# Altium PCB PCB1.PcbDoc
Units mil, origin at the board's own origin, x right, y up, seen from the top; angles counter-clockwise.
Board outline 2125 x 1205 mil, 2 copper layers (Top Layer, Bottom Layer); 7 components, 10 nets, 28 pads, 0 vias.
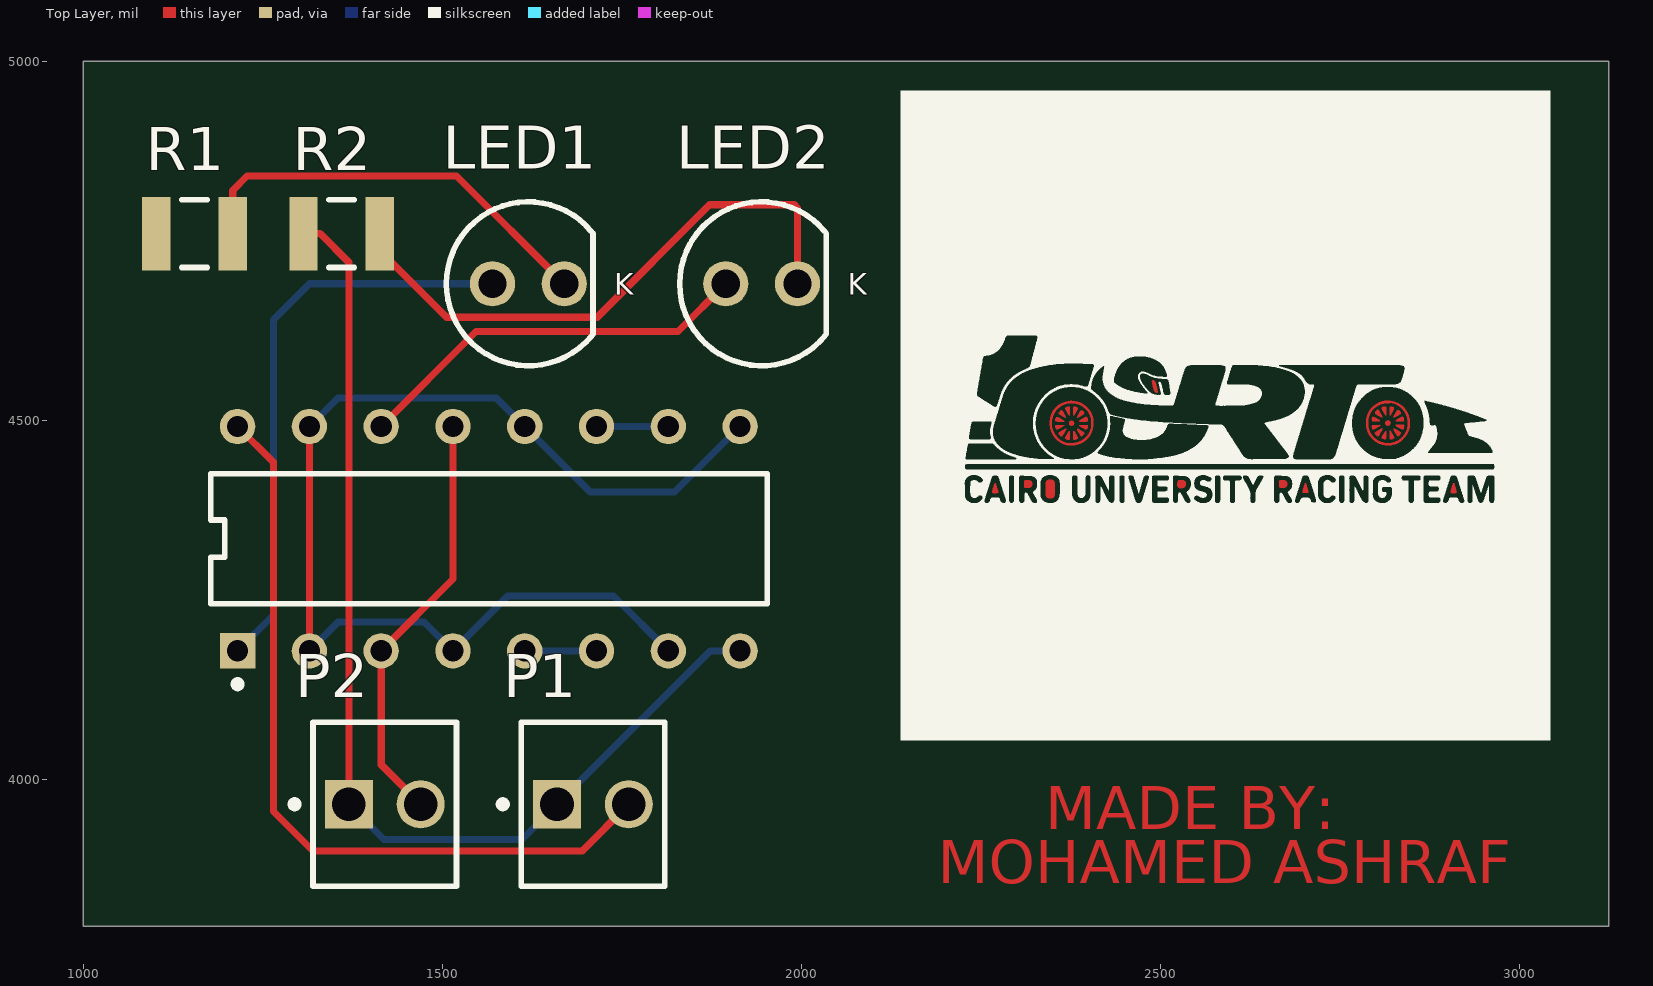
[diagram p0: Top Layer view]
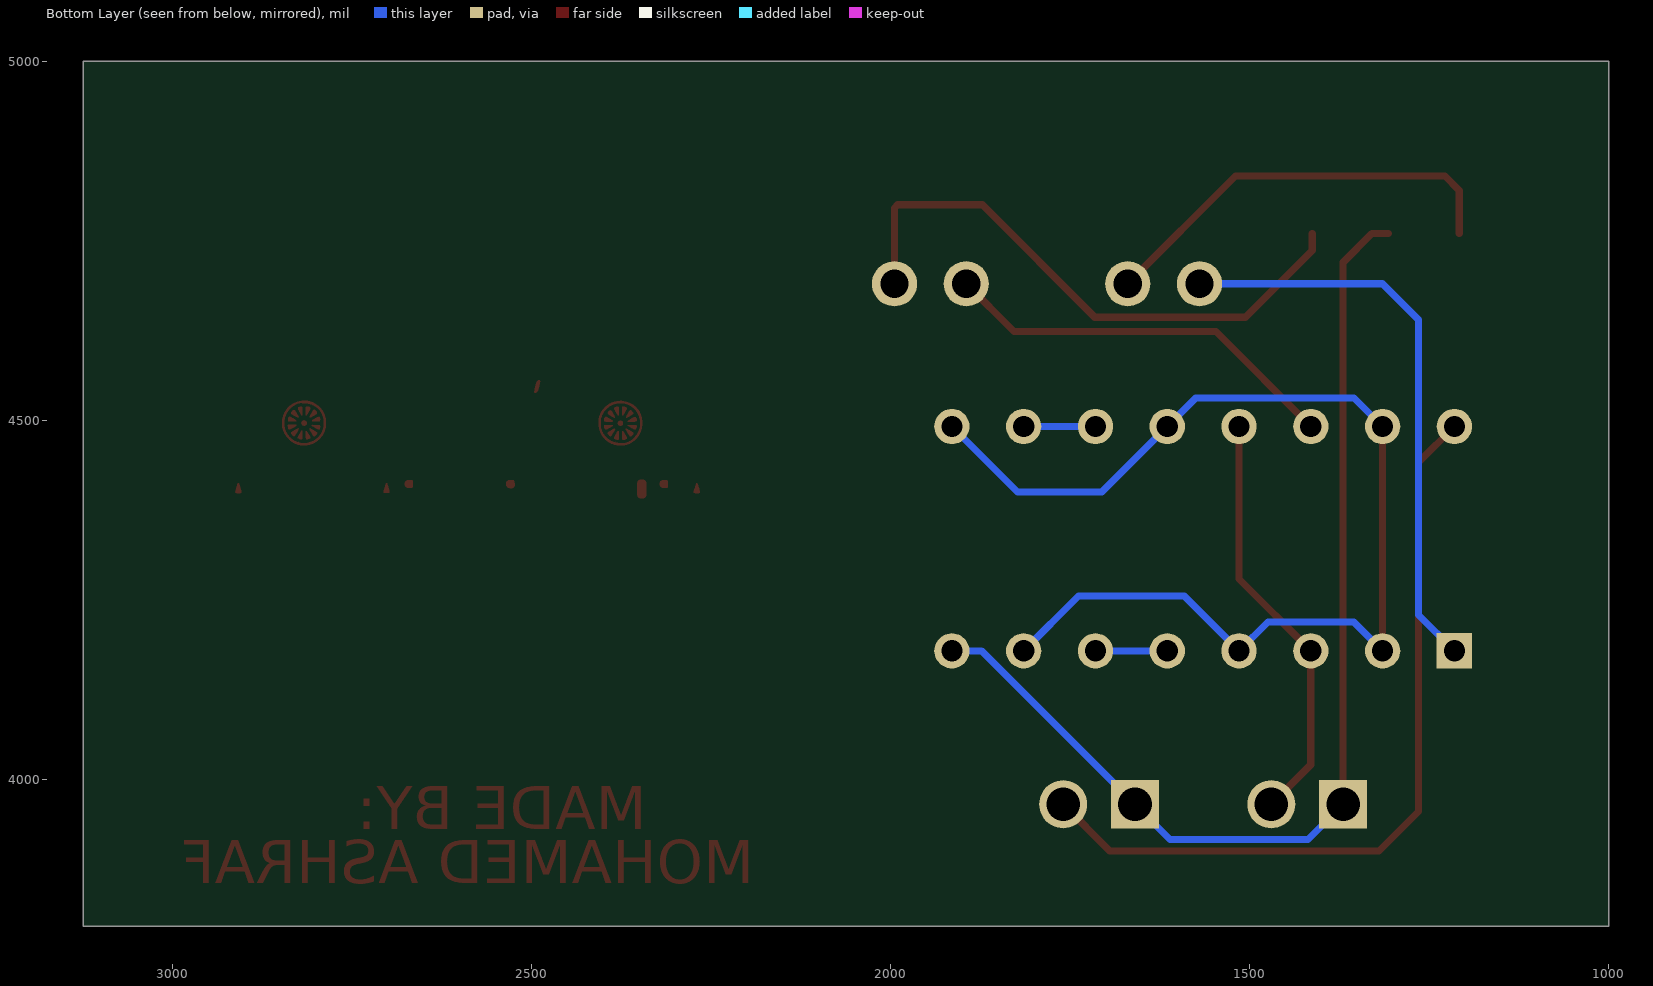
[diagram p1: Bottom Layer view, seen from below]
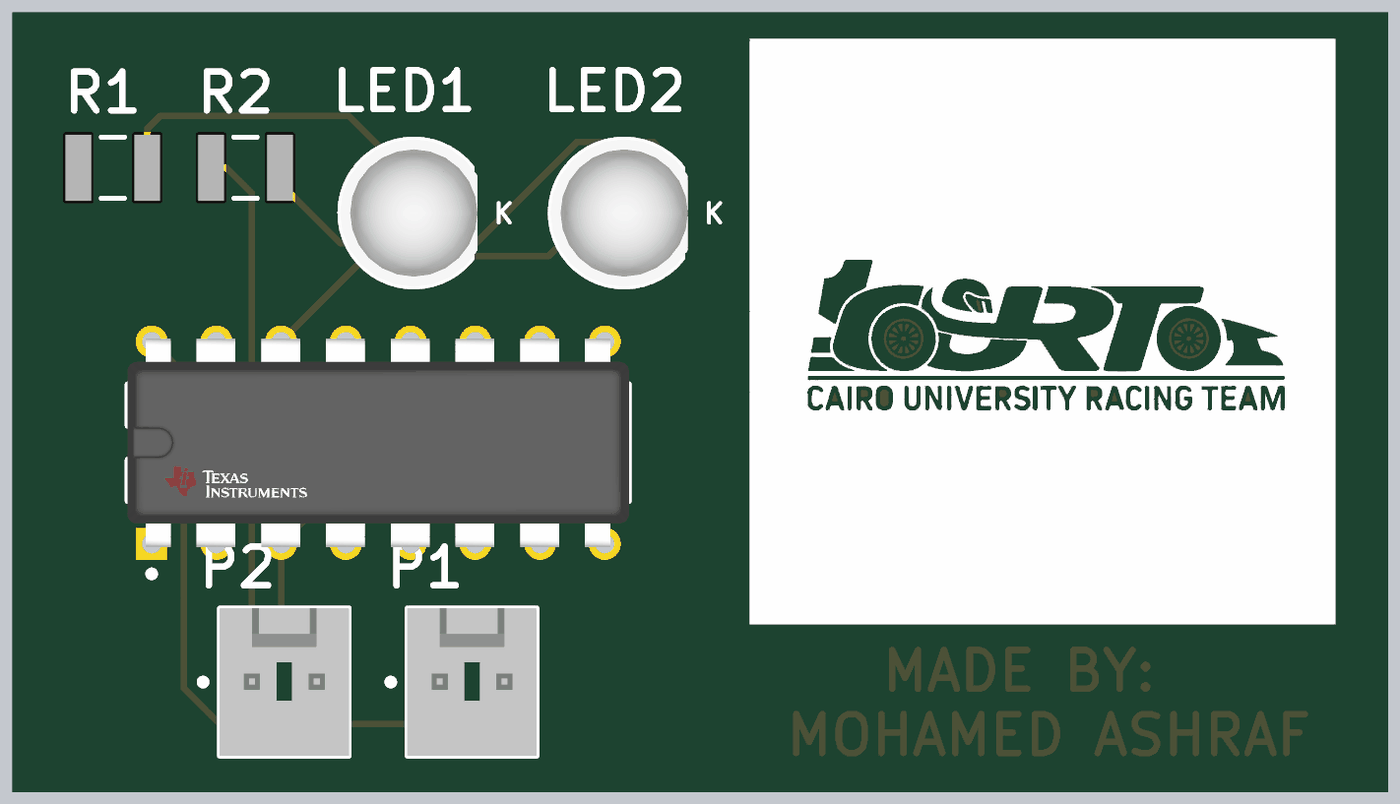
[diagram p2: 3D render of the assembled board from above, using the file's embedded part models]

## Layer stack, top to bottom
Top Solder: solder mask 0.4, Solder Resist, Dk 3.5
Top Layer: signal copper 1.4
Dielectric 1: dielectric 12.6, FR-4, Dk 4.8
Bottom Layer: signal copper 1.4
Bottom Solder: solder mask 0.4, Solder Resist, Dk 3.5

## Board outline
1000,3795 3125,3795 3125,5000 1000,5000

## Design rules (kind name [scope] priority, off if disabled: settings)
Clearance [All] p1: gap=10 ignorepadtopadclearanceinfootprint=FALSE except(0: Arc-Hole Track-Hole SMDPad-Hole THPad-Hole Via-Hole Fill-Hole Poly-Hole Region-Hole Text-Hole)
PolygonConnect [All] p1: connectstyle=Relief reliefconductorwidth=10 reliefentries=4 polygonreliefangle="90 Angle" airgapwidth=10
RoutingVias [All] p1: holewidth=28 width=50 viastyle="Through Hole" minholewidth=28 minwidth=50 maxholewidth=28 maxwidth=50
SolderMaskExpansion [All] p1: expansion=4 istentingtop=FALSE
Width [All] p1: maxlimit=10 minlimit=10 preferedwidth=10
30 further rules are at their usual default settings.

## Components (designator, comment, footprint, x,y, rotation, side; value= is the part's Value field where it differs from the comment)
LED1 "151051BS04000" "BLUE LED" 1620,4690 r0 top
LED2 "151051BS04000" "BLUE LED" 1945,4690 r0 top
P1 "22-27-2021" PIN 1710,3965 r0 top
P2 "22-27-2021" PIN 1420,3965 r0 top
R1 "CRCW1210330RJNEA" "330OHM RES" 1155,4760 r0 top
R2 "CRCW1210330RJNEA" "330OHM RES" 1360,4760 r0 top
? "CD4027BE" "JK FLIP FLOP" 1565,4335 r90 top

## Footprints (in the part's own frame and the unit in brackets; to place one, negate y for a bottom-side part, rotate by r counter-clockwise, add the part's x,y. Pads: shape width x height; smd on the part's side, far side on the other; paste and mask are expansions set on the pad)
"330OHM RES" [mm] "Chip Resistor, 2-Leads, Body 3.20x2.50mm, IPC High Density"
  rect 1x2.6 smd: 1(-1.35,0) 2(1.35,0)
  silkscreen extent -0.45,-1.2 0.45,1.2, body extent -1.7,-1.35 1.7,1.35, height 0.6
"BLUE LED" [mm] "THT, LED-5mm, 2pin- Body 5.8mm"
  round 1.6 hole 1: 1(1.27,0) 2(-1.27,0)
  silkscreen extent -2.9,-2.9 2.29,2.9, body extent -2.9,-2.9 2.5,2.9, height 11.7
"JK FLIP FLOP" [mm]
  rect 1.25x1.25 hole 0.75 paste-1000 mask+0: 1(-3.97,8.89)
  round 1.25 hole 0.75 paste-1000 mask+0: 2(-3.97,6.35) 3(-3.97,3.81) 4(-3.97,1.27) 5(-3.97,-1.27) 6(-3.97,-3.81) 7(-3.97,-6.35) 8(-3.97,-8.89) 9(3.97,-8.89) 10(3.97,-6.35) 11(3.97,-3.81) 12(3.97,-1.27) 13(3.97,1.27) 14(3.97,3.81) 15(3.97,6.35) 16(3.97,8.89)
  silkscreen extent -5.27,-9.84 2.3,9.84, body extent -4.69,-9.94 4.69,9.94, height 0.25
PIN [mm] "Header, 2-Leads, Body 5.8x5.08mm"
  rect 1.7x1.7 hole 1.19: 1(-1.27,0)
  round 1.7 hole 1.19: 2(1.27,0)
  silkscreen extent -3.31,-2.9 2.54,2.9, body extent -2.54,-2.9 2.54,2.9, height 11.72

## Part data
LED1 LED2: library part "BLUE LED", "THT LED round mono-color color lens, WL-TMRW, Blue", Emitting color=Blue, Manufacturer="Wuerth Elektronik", ComponentLink1Description="Manufacturer URL", ComponentLink1URL=http://www.we-online.com, ComponentLink2Description=Datasheet, ComponentLink2URL=http://katalog.we-online.de/pbs/datasheet/7448042001.pdfhttp://katalog.we-online.de/pbs/datasheet/7448042001.pdfhttp://katalog.we-online.de/pbs/datasheet/7448042001.pdfhttp://katalog.we-online.de/pbs/datasheet/151051BS04000.pdf, PackageReference="Type 5mm", PartNumber=151051BS04000
P1 P2: library part PIN, "Male Header, Pitch 2.54 mm, 1 x 2 Position, Height 11.7 mm, Tail Length 3.56 mm, 0 to 75 degC, RoHS, Bulk", Current - Max=4A, Manufacturer=Molex, Operating temperature=0°Cto+75°C, Package Description="2-Leads Header, Body 5.08 x 5.8 mm, Pitch 2.54 mm", Package Version="Rev. BC, 02/2012", PartNumber=0022272021, Voltage - Max=250V, Contact material=Tinplatedbrass, Current rating=4A, Datasheet URL=http://www.molex.com/pdm_docs/sd/022272021_sd.pdf, Datasheet Version="Rev. F, 06/2009", Housing material=Nylon(UL94V-0), Manufacturer URL=http://www.molex.com/, Mounting Technology=ThroughHole, No. of Positions=2, No. of Rows=1, Orientation=Vertical, Package Reference=22-27-2021, Pitch=2.54mm, Voltage rating=250V
R1 R2: library part "330OHM RES", Manufacturer="Vishay Dale", Part Number=CRCW1210330RJNEA
?: library part "JK FLIP FLOP", "IC FF JK TYPE DUAL 1BIT 16DIP", Case/Package=PDIP, Frequency=24MHz, High Level Output Current=-4.2mA, Input Capacitance=5pF, Low Level Output Current=4.2mA, Max Operating Temperature=125°C, Max Supply Voltage=18V, Min Operating Temperature=-55°C, Min Supply Voltage=3V, Operating Supply Voltage=3.3V, Output Current=6.8mA, Package Quantity=25, Power Dissipation=500mW, Quiescent Current=20uA, Clock Edge Trigger Type="Positive Edge", Contact Plating=Gold, Height=4.57mm, Input Type=SINGLE-ENDED, Lead Free="Lead Free", Length=19.3mm, Logic Function=Flip-Flop, Max Frequency=24MHz, Mount="Through Hole", Number of Bits=2, Number of Bits per Element=1, Number of Circuits=2, Number of Elements=2, Number of Input Lines=2, Number of Output Lines=1, Number of Pins=16, Packaging=Rail/Tube, Polarity=Non-Inverting, Propagation Delay=300ns, Radiation Hardening=No, REACH SVHC="No SVHC", RoHS Compliant=Yes, Series=4000B, Technology=CMOS, Turn-On Delay Time=45ns, Weight=0.03357oz, Width=6.35mm

## Nets (pads, with @x,y where several pads share a name; then routed paths per layer and width w, separated by ;. In a path a pad name is that pad's centre, name@x,y a point inside that pad or via, vN(x,y) a via of type N, cw(c..) or ccw(c..) an arc to the next point about the centre after c; other vN are vias at no path point)
GND: ?.2 ?.4 ?.7 ?.9 ?.12 ?.15 | length 1617.7
  Top Layer w10: ?.2 ?.15
  Bottom Layer w10: ?.2 1355.3,4219 1474.7,4219 ?.4 1591.3,4255 1738.7,4255 ?.7 ; ?.15 1354.7,4531 1575.3,4531 ?.12 1706.3,4400 1823.7,4400 ?.9
Net_1: ?.1 LED1.2 | length 807.7
  Bottom Layer w10: ?.1 1265,4228.7 1265,4640 1315,4690 LED1.2
Net_3: ?.3 ?.13 P2.2 | length 590.5
  Top Layer w10: P2.2 1415,4020 ?.3 1515,4278.7 ?.13
Net_5: ?.5 ?.6 | length 100
  Bottom Layer w10: ?.5 ?.6
Net_8: ?.8 P1.1 P2.1 R2.1 | length 1508.8
  Top Layer w10: R2.1 1330,4760 1370,4720 P2.1
  Bottom Layer w10: P2.1 1419,3916 1611,3916 P1.1 1873.7,4178.7 ?.8
Net_10: ?.10 ?.11 | length 100
  Bottom Layer w10: ?.11 ?.10
Net_14: ?.14 LED2.2 | length 562.3
  Top Layer w10: ?.14 1547.2,4623.5 1828.5,4623.5 LED2.2
Net_16: ?.16 P1.2 | length 1101.7
  Top Layer w10: ?.16 1265,4441.3 1265,3955 1320,3900 1695,3900 P1.2
NetLED1_1: LED1.1 R1.2 | length 592.3
  Top Layer w10: R1.2 1208.15,4820 1228.15,4840 1520,4840 LED1.1
NetLED2_1: LED2.1 R2.2 | length 816.1
  Top Layer w10: R2.2 1413.15,4736.5 1506.14,4643.5 1716,4643.5 1872.5,4800 1990.5,4800 1995,4795.5 LED2.1
pads on no net: R1.1

## Other copper
Top Layer:
  drawing of 36 lines, arcs and shapes, not listed
  text "MADE BY:" at 2340,3930 h60
  text "MOHAMED ASHRAF" at 2190,3855 h60

## Silkscreen, mask and mechanical layers (free items; w line width, h text height)
Top Overlay:
  region: 5 vertices and 38 holes, not listed, extent 2138.6,4054.15 3043.6,4959.15

## Text inside footprints (layer, text, board x,y; h text height)
LED1: Mechanical 15 "K" at 1740,4675 h30; Top Overlay "K" at 1740,4675 h30
LED2: Mechanical 15 "K" at 2065,4675 h30; Top Overlay "K" at 2065,4675 h30